# Altium PCB OLED_BREAKOUT_PCB.PcbDoc
Units mil, origin at the board's own origin, x right, y up, seen from the top; angles counter-clockwise.
Board outline 6000 x 4000 mil, 2 copper layers (Top Layer, Bottom Layer); 1 components, 0 nets, 26 pads, 0 vias.
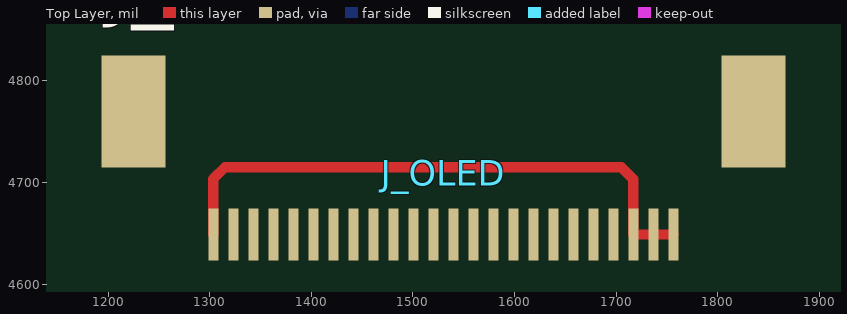
[diagram p0: Top Layer view]
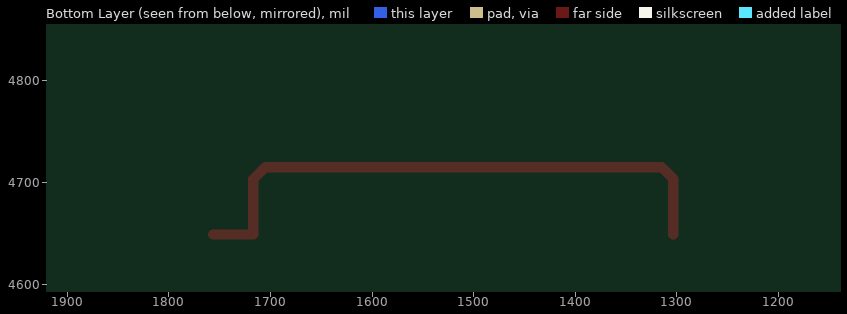
[diagram p1: Bottom Layer view, seen from below]

## Layer stack, top to bottom
Top Solder: solder mask 0.4, Solder Resist, Dk 3.5
Top Layer: signal copper 1.4
Dielectric 1: dielectric 12.6, FR-4, Dk 4.8
Bottom Layer: signal copper 1.4
Bottom Solder: solder mask 0.4, Solder Resist, Dk 3.5

## Board outline
1000,1000 7000,1000 7000,5000 1000,5000

## Design rules (kind name [scope] priority, off if disabled: settings)
Clearance [All] p1: gap=10 ignorepadtopadclearanceinfootprint=FALSE except(0: Arc-Hole Track-Hole SMDPad-Hole THPad-Hole Via-Hole Fill-Hole Poly-Hole Region-Hole Text-Hole)
PolygonConnect [All] p1: connectstyle=Relief reliefconductorwidth=10 reliefentries=4 polygonreliefangle="90 Angle" airgapwidth=10
RoutingVias [All] p1: holewidth=28 width=50 viastyle="Through Hole" minholewidth=28 minwidth=50 maxholewidth=28 maxwidth=50
SolderMaskExpansion [All] p1: expansion=4 istentingtop=FALSE
Width [All] p1: maxlimit=10 minlimit=10 preferedwidth=10
30 further rules are at their usual default settings.

## Components (designator, comment, footprint, x,y, rotation, side; value= is the part's Value field where it differs from the comment)
J_OLED "Comment" J_OLED 1539.33,4649.92 r180 top

## Footprints (in the part's own frame and the unit in brackets; to place one, negate y for a bottom-side part, rotate by r counter-clockwise, add the part's x,y. Pads: shape width x height; smd on the part's side, far side on the other; paste and mask are expansions set on the pad)
J_OLED [mm]
  rect 0.25x1.3 smd: 1(-5.51,0.03) 2(-5.01,0.03) 3(-4.51,0.03) 4(-4.01,0.03) 5(-3.51,0.03) 6(-3.01,0.03) 7(-2.51,0.03) 8(-2.01,0.03) 9(-1.51,0.03) 10(-1.01,0.03) 11(-0.51,0.03) 12(-0.01,0.03) 13(0.49,0.03) 14(0.99,0.03) 15(1.49,0.03) 16(1.99,0.03) 17(2.49,0.03) 18(2.99,0.03) 19(3.49,0.03) 20(3.99,0.03) 21(4.49,0.03) 22(4.99,0.03) 23(5.49,0.03) 24(5.99,0.03)
  rect 1.6x2.8 smd: 25(-7.51,-3.05) 26(7.99,-3.05)

## Nets (pads, with @x,y where several pads share a name; then routed paths per layer and width w, separated by ;. In a path a pad name is that pad's centre, name@x,y a point inside that pad or via, vN(x,y) a via of type N, cw(c..) or ccw(c..) an arc to the next point about the centre after c; other vN are vias at no path point)
pads on no net: J_OLED.1 J_OLED.2 J_OLED.3 J_OLED.4 J_OLED.5 J_OLED.6 J_OLED.7 J_OLED.8 J_OLED.9 J_OLED.10 J_OLED.11 J_OLED.12 J_OLED.13 J_OLED.14 J_OLED.15 J_OLED.16 J_OLED.17 J_OLED.18 J_OLED.19 J_OLED.20 J_OLED.21 J_OLED.22 J_OLED.23 J_OLED.24 J_OLED.25 J_OLED.26
copper on no net: | length 571.6
  Top Layer w10: 1303.5,4648.74 1303.5,4699.25 1303.5,4703.5 1315,4715 1705,4715 1716.89,4703.11 1716.89,4648.74 1736.57,4648.74 1756.26,4648.74